# Altium PCB 090-0472.PcbDoc
Units mil, origin at the board's own origin, x right, y up, seen from the top; angles counter-clockwise.
Board outline 3190.03 x 1228.03 mil, 2 copper layers (TopLayer, BottomLayer); 50 components, 40 nets, 166 pads, 28 vias.
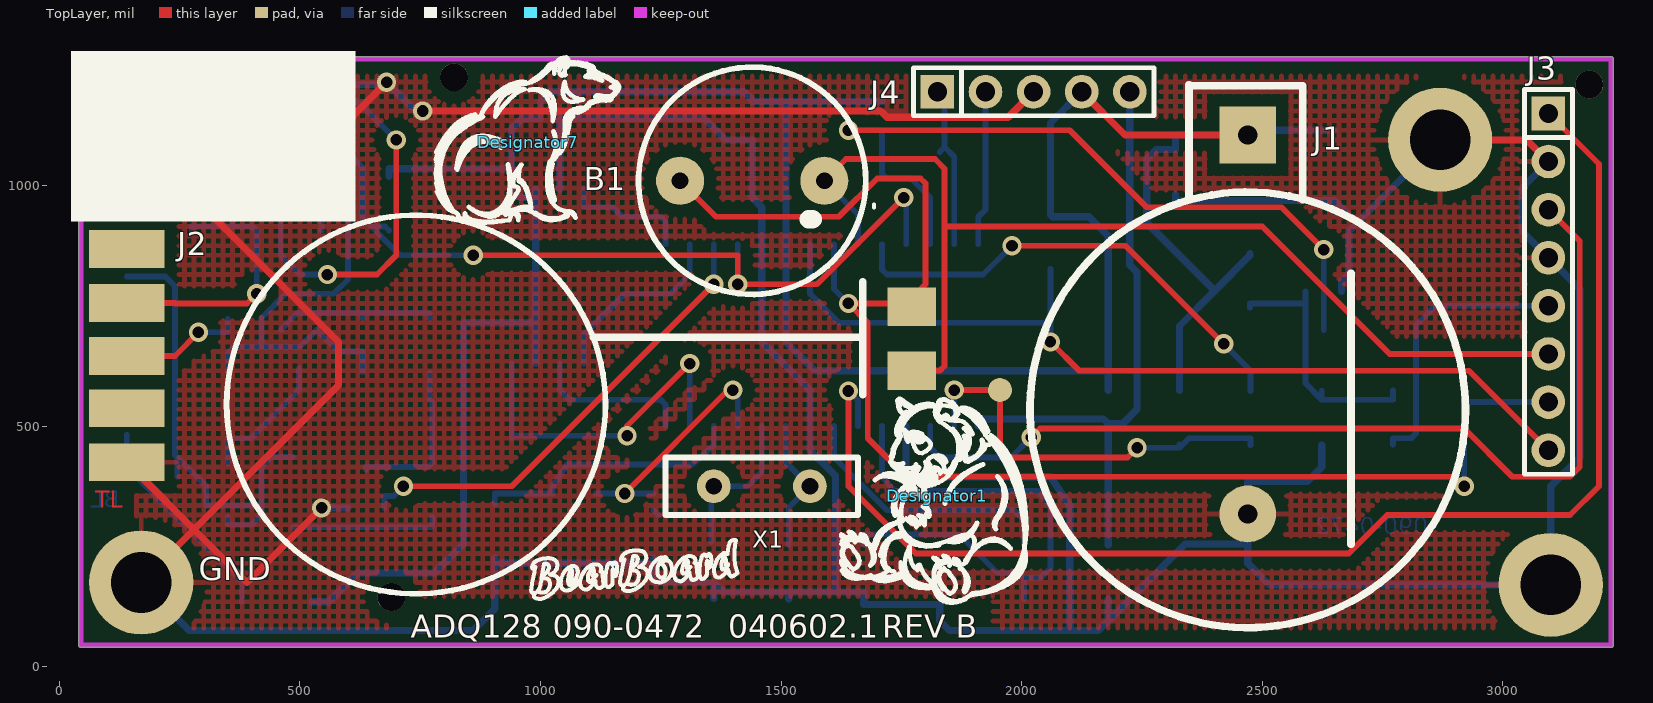
[diagram p0: TopLayer view]
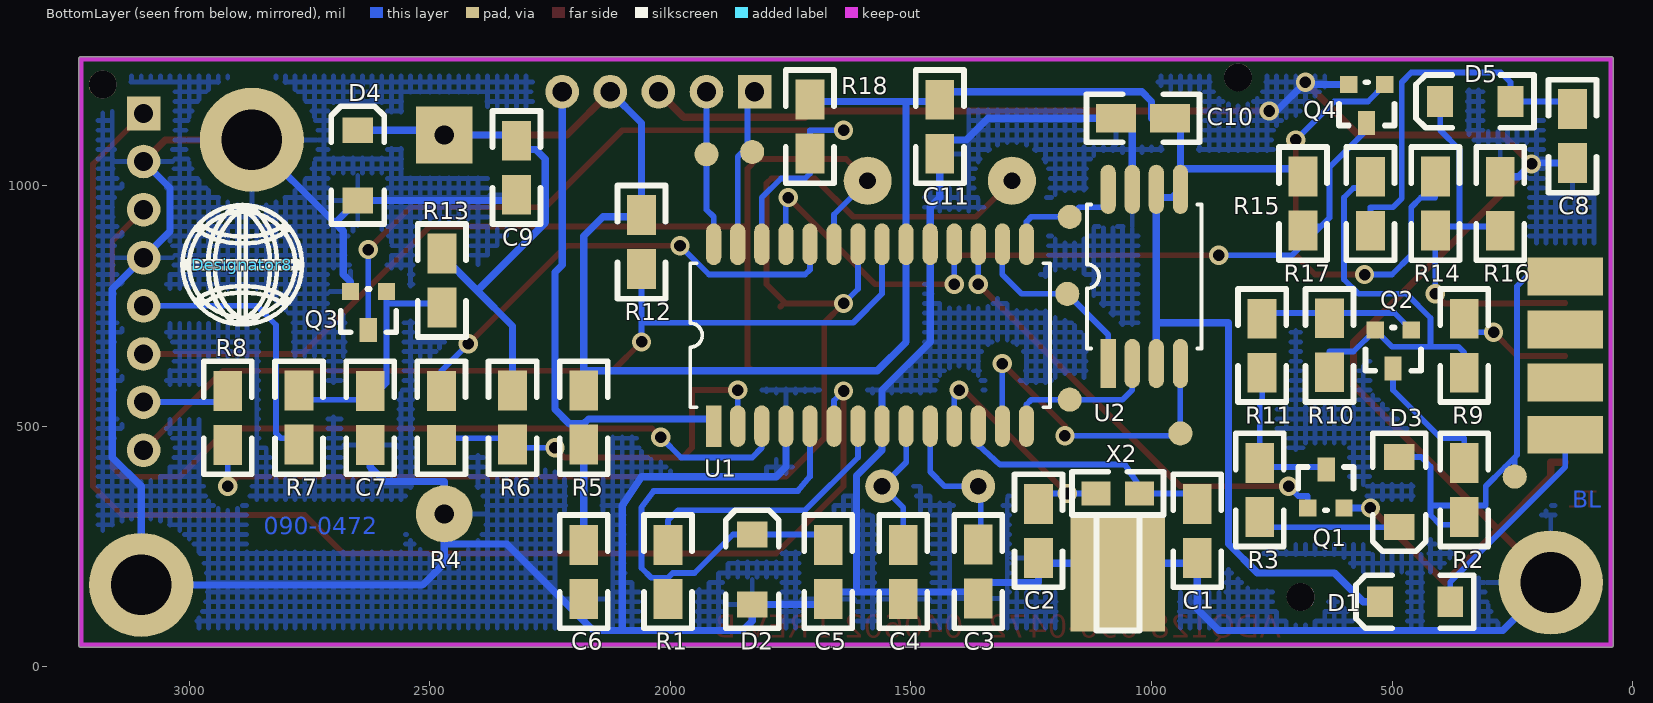
[diagram p1: BottomLayer view, seen from below]

## Layer stack, top to bottom
TopLayer: signal copper 1.4
Dielectric: core 12.6, FR-4, Dk 4.8
BottomLayer: signal copper 1.4

## Board outline
47.5,40.65 cw(c45,45) 39.98,45 39.98,1263 cw(c45,1263) 47.5,1267.35 cw(c50,1263) 50,1268.02 3220,1268.02 cw(c3220,1263) 3222.5,1267.35 cw(c3225,1263) 3230.02,1263 3230.02,45 cw(c3225,45) 3222.5,40.65 cw(c3220,45) 3220,39.99 50,39.99 cw(c50,45)

## Design rules (kind name [scope] priority, off if disabled: settings)
Clearance Clearance_5 [InNetClass('CONTROL') vs InNetClass('GRALIO')] p1: gap=10
Clearance Clearance_6 [InNetClass('GRALIO') vs InNetClass('SERIALS')] p2: gap=10
Clearance Clearance_4 [InNetClass('SERIALS') vs InNetClass('CONTROL')] p3: gap=10
Clearance [All] p4: gap=10
FabricationTestPointUsage TestPointUsage [All] p1: valid=0 allowmultiple=FALSE
FabricationTestpoint Testpoint_1 [All] p1: side=3 testpointundercomponent=TRUE minsize=40 maxsize=60 preferedsize=50 minholesize=0 maxholesize=0 preferedholesize=0 testpointgrid=1 allowsidetop=TRUE allowsidebottom=TRUE usegrid=TRUE gridtolerance=0.01
PolygonConnect [All] p1: connectstyle=Relief reliefconductorwidth=10 reliefentries=4 polygonreliefangle="90 Angle"
RoutingPriority RoutingPriority_6 [InNetClass('SERIALS')] p1: routingpriority=90
RoutingPriority RoutingPriority_7 [InNetClass('CONTROL')] p2: routingpriority=80
RoutingPriority RoutingPriority_8 [InNetClass('GRALIO')] p3: routingpriority=50
RoutingPriority RoutingPriority_10 [InNetClass('POWERIO')] p4: routingpriority=40
RoutingPriority RoutingPriority_9 [InNetClass('HIPOT')] p5: routingpriority=40
RoutingPriority RoutingPriority_11 [InNetClass('POWER')] p6: routingpriority=0
RoutingPriority [All] p7: routingpriority=10
RoutingVias [All] p1: holewidth=24 width=40 viastyle="Through Hole" minholewidth=24 minwidth=40 maxholewidth=24 maxwidth=40
SilkscreenOverComponentPads [All] p1: minsilkscreentomaskgap=10
SolderMaskExpansion SolderMaskExpansion_1 [(HoleSize    = 24.00) And (ViaDiameter = 40.00) And (StartLayer  = 'TopLayer') And (StopLayer   = 'BottomLayer')] p1: expansion=-20
SolderMaskExpansion [All] p2: expansion=4
Width Width_2 [InNetClass('POWER')] p1: maxlimit=20 minlimit=12 preferedwidth=15
Width Width_3 [InNetClass('HIPOT')] p2: maxlimit=20 minlimit=10 preferedwidth=15
Width [All] p3: maxlimit=14 minlimit=10 preferedwidth=12
24 further rules are at their usual default settings.

## Classes and differential pairs
net class HIPOT: VBAT
net class POWER: VBAT VCC VDD VPP VREF-
net class GRALIO: ADIN0 GPIO LB1 LB2 TAMP TOUCH VON_1 VON_2 VREF+ VREF- VSENS
net class CONTROL: DTRH FCS0
net class SERIALS: CLK DIO NetD5_2 RXD SCK SDI SDO TRX- TX TXD WAKEUP

## Components (designator, comment, footprint, x,y, rotation, side; value= is the part's Value field where it differs from the comment)
B1 "PIEZO" RB.3/.6 1590,1010 r0 top locked
C1 "33pF" 1206A0805 905,350 r270 bottom
C2 "33pF" 1206A0805 1235,350 r270 bottom
C3 "22p" 1206A0805 1360,130 r90 bottom
C4 "22p" 1206A0805 1516,265 r270 bottom
C5 ".1uF" 1206A0805 1672,265 r270 bottom
C6 "100nF" 1206A0805 2180,265 r270 bottom
C7 "* 0.1uF" 1206A0805 2624,585 r270 bottom
C8 ".1uF" 1206A0805 125,1035 r90 bottom locked
C9 "470nF" 1206A0805 2320,1105 r270 bottom
C10 ".1uF" 1206A0805 950,1140 r0 bottom
C11 "100nF" 1206A0805 1440,1190 r270 bottom
D1 "*" MLL34 525,135 r0 bottom
D2 "2V7" MLL34 1830,275 r90 bottom
D3 "4148" MLL34 485,290 r270 bottom
D4 "4148" MLL34 2650,1115 r90 bottom
D5 "1N4148" MLL34 400,1175 r0 bottom
Designator1 "Comment" GR_BEAR 1825,355 r0 top
Designator7 "Comment" GR_BEAR2 975,1090 r0 top
Designator8 "Comment" GR_TERRA 2890,835 r180 bottom
J1 "CR2032 LPH4" LPH4 2470,1105 r270 top locked
J2 "DCE" sdb9m 140,425 r180 top locked
J3 "AUX" SIP8 3095,1150 r270 top locked
J4 "PRG" SIP5 1825,1195 r0 top locked
Q1 "7002" SOT-23 675,330 r180 bottom
Q2 "7002" SOT-23 460,700 r0 bottom
Q3 "7002" SOT-23 2590,780 r0 bottom
Q4 "7002" SOT-23 515,1210 r0 bottom
R1 "10K" 1206A0805 2005,265 r270 bottom
R2 "270" 1206A0805 350,435 r270 bottom
R3 "270" 1206A0805 775,435 r270 bottom
R4 "10K" 1206A0805 2476,585 r270 bottom
R5 "47K" 1206A0805 2180,450 r90 bottom
R6 "10K" 1206A0805 2328,450 r90 bottom
R7 "470" 1206A0805 2772,450 r90 bottom
R8 "220" 1206A0805 2920,585 r270 bottom
R9 "270" 1206A0805 350,735 r270 bottom
R10 "10M" 1206A0805 630,600 r90 bottom
R11 "4K7" 1206A0805 770,735 r270 bottom
R12 "10K" 1206A0805 2060,815 r90 bottom
R13 "10M" 1206A0805 2475,735 r90 bottom
R14 "10K" 1206A0805 410,895 r90 bottom
R15 "4K7" 1206A0805 545,1030 r270 bottom
R16 "3K3" 1206A0805 275,1030 r270 bottom
R17 "2K2" 1206A0805 685,895 r90 bottom
R18 "47K" 1206A0805 1710,1055 r90 bottom
U1 "LF876" so28w 1910,500 r90 bottom
U2 "45DB011" SO8W 1090,630 r90 bottom
X1 "3.6864MHZ" XTAL1 1560,375 r180 top
X2 "32Khz" 0805 1025,360 r0 bottom locked

## Footprints (in the part's own frame and the unit in brackets; to place one, negate y for a bottom-side part, rotate by r counter-clockwise, add the part's x,y. Pads: shape width x height; smd on the part's side, far side on the other; paste and mask are expansions set on the pad)
0805 [mil]
  rect 60x50 smd: 1(0,0) 2(90,0)
  silkscreen extent -50,-45 140,45
1206A0805 [mil]
  rect 82.68x60 smd: 1(11.81,0) 2(124.05,0)
  silkscreen extent -50,-50 185,50
GR_BEAR [mil]
  silkscreen extent -200,-222 185,202
GR_BEAR2 [mil]
  silkscreen extent -192,-167 188,177
GR_TERRA [mil]
  silkscreen extent -124,-124 125,124
LPH4 [mm]
  round 2 on Top Overlay: 0(6.402,5.451) 0(14.354,-9.902) 0(22.456,5.451)
  rect 2.997x2.997 hole 1.016: 1(0,0)
  round 2.997 hole 1.016: 2(20,0)
  silkscreen extent -2.65,-11.5 26.01,11.5
MLL34 [mil]
  rect 54x64 smd: 1(0,0) 2(-146,0)
  silkscreen extent -195,-55 50,55
RB.3/.6 [mil]
  round 100 hole 35: 1(0,0) 2(-300,0)
  silkscreen extent -386,-236 86,236
sdb9m [mm]
  rect 4x2 smd: 1(0,-11.253) 2(0,-8.402) 3(0,-5.601) 4(0,-2.851) 5(0,0)
  rect 4x2 smd far side: 6(0,-9.802) 7(0,-7.002) 8(0,-4.201) 9(0,-1.45)
SIP5 [mil]
  rect 70x70 hole 40: 1(0,0)
  round 70 hole 40: 2(100,0) 3(200,0) 4(300,0) 5(400,0)
  silkscreen extent -50,-50 450,50
SIP8 [mil]
  rect 70x70 hole 40: 1(0,0)
  round 70 hole 40: 2(100,0) 3(200,0) 4(300,0) 5(400,0) 6(500,0) 7(600,0) 8(700,0)
  silkscreen extent -50,-50 750,50
SO8W [mm]
  rect 2.6x0.8 smd: 1(0,0)
  oval 2.6x0.8 smd: 2(0,-1.27) 3(0,-2.54) 4(0,-3.81) 5(9.2,-3.81) 6(9.2,-2.54) 7(9.2,-1.27) 8(9.2,0)
  silkscreen extent 0.8,-4.93 8.4,1.12
so28w [mm]
  rect 2.2x0.8 smd: 1(0,0)
  oval 2.2x0.8 smd: 2(0,-1.27) 3(0,-2.54) 4(0,-3.81) 5(0,-5.08) 6(0,-6.35) 7(0,-7.62) 8(0,-8.89) 9(0,-10.16) 10(0,-11.43) 11(0,-12.7) 12(0,-13.97) 13(0,-15.24) 14(0,-16.51) 15(9.6,-16.51) 16(9.6,-15.24) 17(9.6,-13.97) 18(9.6,-12.7) 19(9.6,-11.43) 20(9.6,-10.16) 21(9.6,-8.89) 22(9.6,-7.62) 23(9.6,-6.35) 24(9.6,-5.08) 25(9.6,-3.81) 26(9.6,-2.54) 27(9.6,-1.27) 28(9.6,0)
  silkscreen extent 1,-17.75 8.6,1.24
SOT-23 [mil]
  rect 36x36 smd: 1(0,0) 2(75,0)
  rect 36x50 smd: 3(38,80)
  silkscreen extent -20,-5 95,85
XTAL1 [mil]
  round 70 hole 35: 1(0,0) 2(200,0)
  silkscreen extent -100,-60 300,60

## Free pads (board coordinates)
  round 216.54 hole 125.98: 0(170,175)
  rect 100x80 smd: 0(1771.65,748.03) 1(1771.65,615)
  round 216.53 hole 125.98: 1(2870,1095) 2(3100,170)
  round 58 hole 58 unplated: 2(690,145) 2(820,1225) 3(3180,1210)
  rect 196.85x244.09 smd far side: 6(1070,195)
  round 50 smd far side: T5(1170,555) T23(245,395) T24(1830,1070) T25(1925,1065) T26(940,485) T27(1170,935) T28(1175,775)
  round 50 smd: T18(1955,575)

## Via types
v1: diameter 40, hole 24, TopLayer to BottomLayer, 28 vias

## Nets (pads, with @x,y where several pads share a name; then routed paths per layer and width w, separated by ;. In a path a pad name is that pad's centre, name@x,y a point inside that pad or via, vN(x,y) a via of type N, cw(c..) or ccw(c..) an arc to the next point about the centre after c; other vN are vias at no path point)
ADIN0: J3.3 U1.3 | length 2039.8
  TopLayer w12: v1(2020,477) 2038,495 2920,495 3020,395 3140,395 3160,415 3160,885 J3.3
  BottomLayer w12: U1.3 1810,455 1830,435 1978,435 v1(2020,477)
CLK: J4.1 pad.T24 U1.27 | length 345.7
  BottomLayer w12: J4.1 1840,1180 pad.T24@1840,1080 ; pad.T24 pad.T24@1840,1080 ; U1.27 1860,1060 pad.T24@1840,1080
DIO: J4.2 pad.T25 U1.28 | length 323.3
  BottomLayer w12: U1.28 1910,935 1925,950 pad.T25 J4.2
DTRH: D3.2 J2.6 pad.T23 R2.2 | length 1014.7
  BottomLayer w12: J2.6 220,810.92 240,790.92 240,440 245,435 ; pad.T23 245,435 ; R2.2 350,295 400,295 420,315 420,335 ; D3.2 440,436 420,416 420,335 ; 245,435 265,415 305,375 305,335 350,335 420,335
FCS0: pad.T26 U1.13 U2.4 | length 730.9
  TopLayer w12: v1(1180,480) 1180,500 v1(1310,630)
  BottomLayer w12: pad.T26@940,475 U2.4 ; pad.T26 945,480 v1(1180,480) ; U1.13 v1(1310,630)
GPIO: J3.1 U1.6 | length 2773.8
  TopLayer w12: v1(1640,573) 1640,375 1780,235 2680,235 2760,315 3140,315 3200,375 3200,1045 J3.1
  BottomLayer w12: v1(1640,573) 1660,553 U1.6
LB1: B1.2 pad.0@1771.65,748.03 R8.2 U1.22 | length 2778.8
  TopLayer w12: B1.2 1365,935 1620,935 1700,1015 1790,1015 1800,1005 1800,795 pad.0@1760,755 ; pad.0@1771.65,748.03 1764.68,755 pad.0@1760,755 ; v1(2920,375) 2900,395 1760,395 1680,475 1680,715 v1(1640,755) pad.0@1760,755
  BottomLayer w12: U1.22 1610,785 v1(1640,755) ; v1(2920,375) R8.2
LB1_2: J3.7 R8.1 | length 198.2
  BottomLayer w12: R8.1 2920,550 J3.7
LB2: B1.1 J3.6 pad.1@1771.65,615 U1.23 | length 2285.2
  TopLayer w12: B1.1 1635,1055 1820,1055 1840,1035 1840,915 ; pad.1@1771.65,615 1830,615 1840,625 1840,915 ; J3.6 2765,650 2500,915 1840,915
  BottomLayer w12: B1.1 1660,940 U1.23
LDR1: J3.5 R7.1 | length 581.9
  BottomLayer w12: R7.1 2772,475 2810,475 2820,485 2820,710 2860,750 J3.5
NetD3_2: C8.2 D5.2 R15.2 | length 791
  BottomLayer w12: C8.2 125,1175 D5.2 254,1215 274,1235 460,1235 480,1215 480,973 498,955 545,955 R15.2
NetD5_2: D1.2 J2.9 | length 446.1
  BottomLayer w12: J2.9 140,415 379,176 D1.2
NetQ4_1: C7.1 Q3.1 R7.2 R13.1 | length 547.5
  BottomLayer w12: R13.1 2475,755 2590,755 ; Q3.1 2590,755 ; C7.1 C7.1@2624,555 ; R7.2 2772,555 C7.1@2624,555 ; 2590,755 2590,589 C7.1@2624,555
NetR1_2: Q4.1 R14.2 | length 948.1
  TopLayer w12: v1(557,815) 660,815 700,855 v1(700,1095)
  BottomLayer w12: R14.2 410,975 440,975 460,955 460,855 500,815 v1(557,815) ; Q4.1 550,1175 620,1175 v1(700,1095)
NetR8_1: Q1.3 R3.1 R11.2 | length 336.2
  BottomLayer w12: Q1.3 637,415 766.81,415 R3.1 775,550 770,555 R11.2
NetR8_2: D3.1 R3.2 | length 311
  BottomLayer w12: D3.1 775,290 R3.2
NetR9_1: Q2.3 R2.1 | length 286.2
  BottomLayer w12: R2.1 350,475 398,475 498,575 Q2.3
NetR11_1: Q2.1 R10.2 R11.1 | length 347.3
  BottomLayer w12: Q2.1 495,735 R10.2@630,735 ; R10.2 R10.2@630,735 ; R11.1 770,735 R10.2@630,735
NetR12_1: Q2.2 R9.2 R10.1 R15.1 | length 932.9
  BottomLayer w12: R9.2 350,653 362,665 420,665 ; R15.1 545,995 580,995 600,975 600,805 570,775 470,775 420,725 420,665 ; R10.1 630,655 580,655 Q2.2 500,665 420,665
NetU1_9: C4.1 U1.9 X1.1 | length 285.8
  BottomLayer w12: U1.9 1510,425 X1.1 1516,331 C4.1
NetU1_11: C2.1 U1.11 X2.2 | length 527.3
  TopLayer w12: v1(1175,360) 1390,575 v1(1400,575)
  BottomLayer w12: X2.2 C2.1@1235,360 ; C2.1@1235,325 C2.1@1245,315 ; v1(1400,575) 1410,565 U1.11
NetU1_12: C1.1 U1.12 X2.1 | length 571.1
  BottomLayer w12: C1.1 905,360 X2.1 1025,375 1055,420 1315,420 1360,460 U1.12
NetX1_2: C3.2 U1.10 X1.2 | length 324.5
  BottomLayer w12: C3.2@1355,260 1355,370 X1.2 1430,375 1460,405 U1.10
NewNet: 
RXD: D5.1 J2.2 R14.1 R16.2 | length 834.9
  TopLayer w12: J2.2 240,755.79 240,755 390,755 v1(410,775)
  BottomLayer w12: R16.2 275,915 360,915 ; D5.1 400,1115 360,1075 360,915 ; v1(410,775) R14.1 401.81,915 360,915
SCK: pad.T5 U1.14 U2.2 | length 332.4
  BottomLayer w12: U2.2 1040,575 1060,555 pad.T5 1250,555 1260,545 U1.14
SDI: pad.T27 U1.15 U2.8 | length 266.7
  BottomLayer w12: U2.8 1090,955 1150,955 pad.T27 1250,935 1260,925 U1.15
SDO: pad.T28 U1.16 U2.1 | length 394.7
  BottomLayer w12: U2.1 1090,690 pad.T28 1270,775 1310,815 U1.16
TAMP: Q3.3 R18.1 U1.26 | length 1635.5
  TopLayer w12: v1(1640,1115) 2100,1115 2260,955 2540,955 v1(2628,867)
  BottomLayer w12: v1(1640,1115) 1710,1115 R18.1 1710,1025 1720,1015 1770,1015 1810,975 U1.26 ; Q3.3 v1(2628,867)
TOUCH: J3.8 R12.1 U1.21 | length 1907.8
  TopLayer w12: v1(2060,675) 2120,615 2930,615 J3.8
  BottomLayer w12: U1.21 1560,775 1620,715 2060,715 ; v1(2060,675) 2060,715 ; R12.1 2060,715
TX: Q1.1 U1.17 | length 975.2
  TopLayer w12: v1(715,375) 940,375 v1(1360,795)
  BottomLayer w12: Q1.1 675,355 695,355 v1(715,375) ; v1(1360,795) U1.17
TXD: J2.3 R9.1 | length 259
  TopLayer w12: J2.3 240,645.53 240,646 v1(289,695)
  BottomLayer w12: v1(289,695) 350,695 R9.1
VDD: C9.1 C10.1 C11.1 D1.1 D4.1 J1.1 J4.4 R5.2 R6.2 R12.2 R13.2 R17.2 R18.2 U1.20 U2.3 U2.5 U2.6 | length 6057.1
  TopLayer w15: J4.4 2215,1105 J1.1
  BottomLayer w15: D1.1 560,135 620,195 780,195 840,255 840,715 990,715 ; R17.2 685,1035 U2.5@940,1035 ; U2.3 990,715 ; U2.6 U2.6@990,975 ; R18.2 1710,1175 1510,1175 ; J4.4 2060,1130 R12.2 2064.05,935 2140,935 2180,895 R5.2@2180,615 ; R5.2 R5.2@2180,615 ; R6.2 2328,708 2401.5,781.5 ; R13.2 2475,855 2401.5,781.5 ; D4.1 2480,1115 J1.1 2320,1105 2320,1075 2280,1075 2260,1055 2260,923 2401.5,781.5 ; U2.5@940,1035 940,1118.19 C10.1 1000,1140 1000,1175 1020,1195 1423.19,1195 C11.1 1440,1175 1510,1175 ; U2.5@940,1035 U2.5 957.2,975 U2.6@990,975 ; 990,715 U2.6@990,975 ; 1510,1175 U1.20 1510,675 1570,615 R5.2@2180,615
VON_1: R1.1 U1.7 | length 565.1
  BottomLayer w12: U1.7 1610,435 1720,325 1984,325 2005,304 R1.1
VON_2: R4.1 U1.24 | length 997.5
  TopLayer w12: v1(1980,875) 2216,875 v1(2420,671)
  BottomLayer w12: U1.24 1710,825 1720,815 1920,815 v1(1980,875) ; v1(2420,671) 2476,615 R4.1
VPP: C6.1 J4.5 R5.1 U1.1 | length 1279.6
  BottomLayer w15: U1.1 1910,515 2170,515 2180,505 ; C6.1 R5.1 2180,505 ; J4.5 2225,835 2240,820 2240,535 2210,505 2180,505
VREF+: C5.1 D2.1 R1.2 U1.5 | length 1111.7
  BottomLayer w12: C5.1 1672,275 D2.1 1870,275 1950,195 1995,195 2005,185 ; U1.5 1710,395 1735,365 2035,365 2060,331 2060,205 2040,185 2005,185 ; R1.2 2005,185
VREF-: C1.2 C2.2 C3.1 C4.2 C5.2 C6.2 C7.2 C8.1 C9.2 C10.2 C11.2 D2.2 D4.2 J1.2 J2.5 J3.2 J3.4 J4.3 pad.0@170,175 pad.1@2870,1095 pad.2@3100,170 pad.6 Q1.2 Q3.2 Q4.2 R16.1 U1.4 U1.8 U1.19 U2.7 | length 12175.1
  TopLayer w15: J2.5 170,425 170,395 280,285 ; pad.0@170,175 280,285 ; v1(545,330) 390,175 280,285 ; v1(680,1215) 570,1105 270,1105 v1(210,1045) 580,675 580,585 280,285 ; v1(755,1155) 1707,1155 1720,1142 1972,1142 J4.3 ; pad.1@2870,1095 3050,1095 J3.2
  BottomLayer w15: C8.1 208.19,1046.81 236.81,1018.19 R16.1 ; pad.0@170,175 270,75 860,75 905,120 C1.2@905,215 ; v1(545,330) Q1.2 ; Q4.2 675,1210 v1(680,1215) 740,1155 v1(755,1155) ; C1.2 C1.2@905,215 ; U2.7 1040,1140 1340,1140 1385,1095 1440,1095 1440,975 1460,955 U1.19 1460,675 1560,575 U1.8 1560,450 1613,397 1613,155 ; pad.6 pad.6@1070,215 ; C2.2 C2.2@1235,215 ; C3.1 C3.1@1360,175 ; C4.2 C4.2@1516,155 ; U1.4 1760,415 1780,395 2060,395 2100,335 2100,75 ; C6.2 2180,95 ; C9.2 2320,969 D4.2 2697,922 ; C7.2 2624,415 2594,385 2470,385 J1.2 2470,255 ; Q3.2 2665,800 2680,815 2680,905 2697,922 ; pad.1@2870,1095 2697,922 ; J3.2 3040,995 3040,905 J3.4 3160,785 3160,435 3100,375 3100,170 2515,170 2470,215 2470,255 ; C1.2@905,215 pad.6@1070,215 ; pad.6@1070,215 C2.2@1235,215 ; C2.2@1235,215 1235,175 C3.1@1360,175 ; C3.1@1360,175 1380,155 C4.2@1516,155 ; C4.2@1516,155 1613,155 ; 1613,155 1672,155 1672,129 D2.2 1830,95 1850,75 2100,75 ; 2100,75 2160,75 2180,95 ; 2180,95 2202.98,117.98 2340,255 2470,255
VSENS: pad.T18 R4.2 R6.1 U1.2 | length 856.7
  TopLayer w12: v1(1860,575) pad.T18 1955,455 1975,435 2220,435 v1(2240,455)
  BottomLayer w12: U1.2 v1(1860,575) ; v1(2240,455) R6.1@2328,455 ; R6.1 R6.1@2328,455 ; R4.2 2476,475 2348,475 R6.1@2328,455
WAKEUP: Q4.3 R17.1 U1.18 U1.25 | length 1743.2
  TopLayer w12: v1(860,855) 1410,855 v1(1410,795) 1575,795 v1(1755,975)
  BottomLayer w12: Q4.3 553,1115 630,1038 630,933 648,915 ; R17.1 676.81,915 648,915 ; v1(860,855) 708,855 670.59,892.41 648,915 ; v1(1410,795) U1.18 ; v1(1755,975) 1760,970 U1.25
pads on no net: J1.0 J2.1 J2.4 J2.7 J2.8

## Polygon pours and split planes (outlines as drawn)
VREF- on TopLayer "TopLayer-VREF-" (hatched 90Degree grid 20 track 10, remove dead copper, pour order 2): 45,1265 3225,1265 3225,55 45,55
VREF- on BottomLayer "BottomLayer-VREF-" (hatched 90Degree grid 20 track 10, remove dead copper, pour order 4): 45,1265 3225,1265 3225,55 45,55 45,1280 55,1280

## Keep-outs
KeepOutLayer:
  lines w10: 45,45 45,1263 ; 50,45 3220,45 ; 50,1263 3220,1263 ; 3225,45 3225,1263

## Other copper
TopLayer:
  text "TL" at 75,330 h36
  text "ADQ128" at 730,60 h48
  text "090-0472" at 1025,60 h48
  text "040602.1" at 1390,60 h48
  text "REV B" at 1710,60 h48
BottomLayer:
  text "BL" at 125,330 h36
  text "090-0472" at 2845,275 h36

## Silkscreen, mask and mechanical layers (free items; w line width, h text height)
TopOverlay:
  drawing of 1108 lines, arcs and shapes, not listed
  text "GND" at 290,180 h48
  text "ADQ128" at 730,60 h48
  text "090-0472" at 1025,60 h48
  text "040602.1" at 1390,60 h48
  text "REV B" at 1710,60 h48
BottomOverlay:
  lines w12: 1025,74.84 1025,315 1111.61,315 ; 1028,75 1111.61,75 ; 1114.21,74.84 1114.21,315
Mechanical4:
  lines w10: -165,60 -145,0 ; -165,1243.15 -145,1303.15 ; -155,0 -135,0 ; -155,1303.15 -135,1303.15 ; -150,0 -70,0 ; -145,295.68 -145,0 ; -145,1007.46 -145,1303.15 ; -125,60 -145,0 ; -125,1243.15 -145,1303.15 ; -65,1303.15 -145,1303.15 ; 0,-105 0,-25 ; 0,-95 0,-75 ; 0,-5 3248.03,-5 ; 0,0 0,1303.15 3248.03,1303.15 ; 60,-105 0,-85 ; 60,-65 0,-85 ; 1339.09,-85 0,-85 ; 1900.91,-85 3240,-85 ; 3180,-105 3240,-85 ; 3180,-65 3240,-85 ; 3240,-95 3240,-75 ; 3257,-105 3257,-25 ; 3257,0 3257,1303.15
  text "1303.15 (mil)" at -109.01,305.68 h60 r90
  text "+- 0.3 (mm)" at -30,280 h60 r90
  text "3240 (mil)" at 1349.09,-120.99 h60
DrillDrawing:
  text ".LEGEND" at 3821.1,115 h60
  text "Drill Drawing." at 3821.1,15 h60